# Altium PCB TLC5510.PcbDoc
Units mil, origin at the board's own origin, x right, y up, seen from the top; angles counter-clockwise.
Board outline 6000 x 4000 mil, 2 copper layers (Top Layer, Bottom Layer); 58 components, 38 nets, 167 pads, 0 vias.
Unrouted connection lines stored in the file: 8.
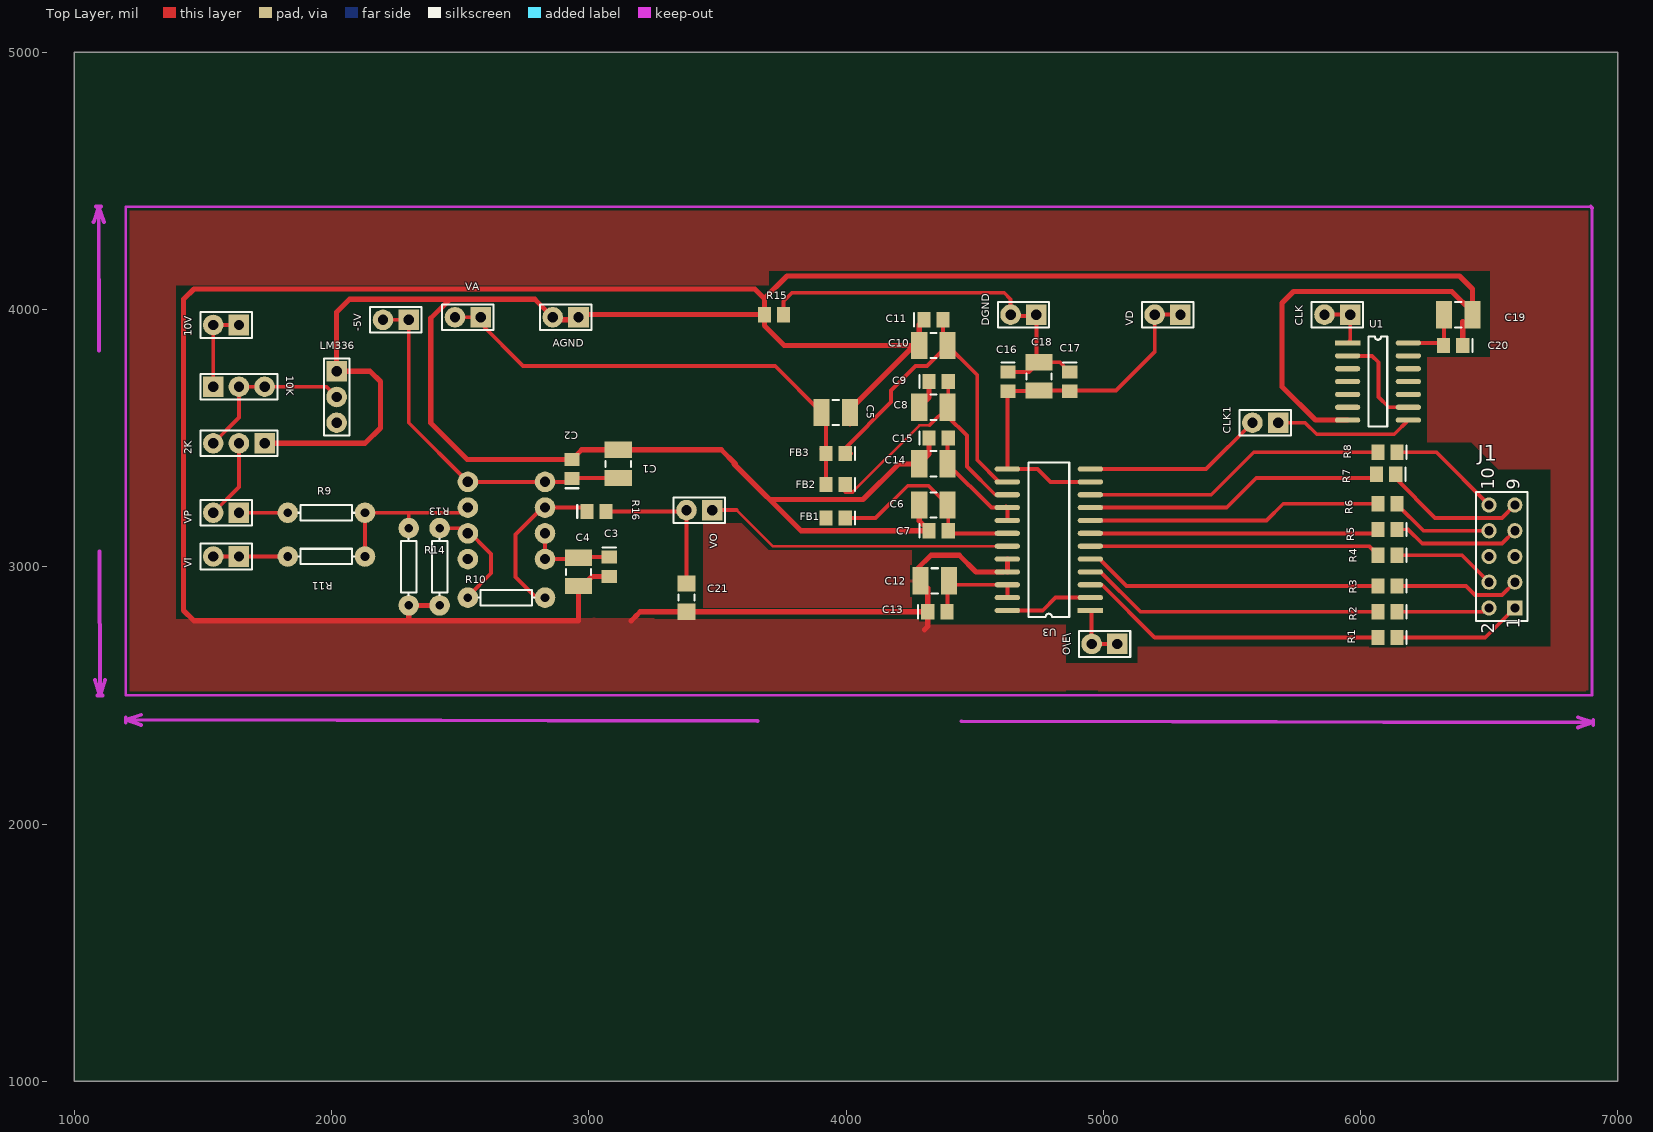
[diagram p0: Top Layer view]
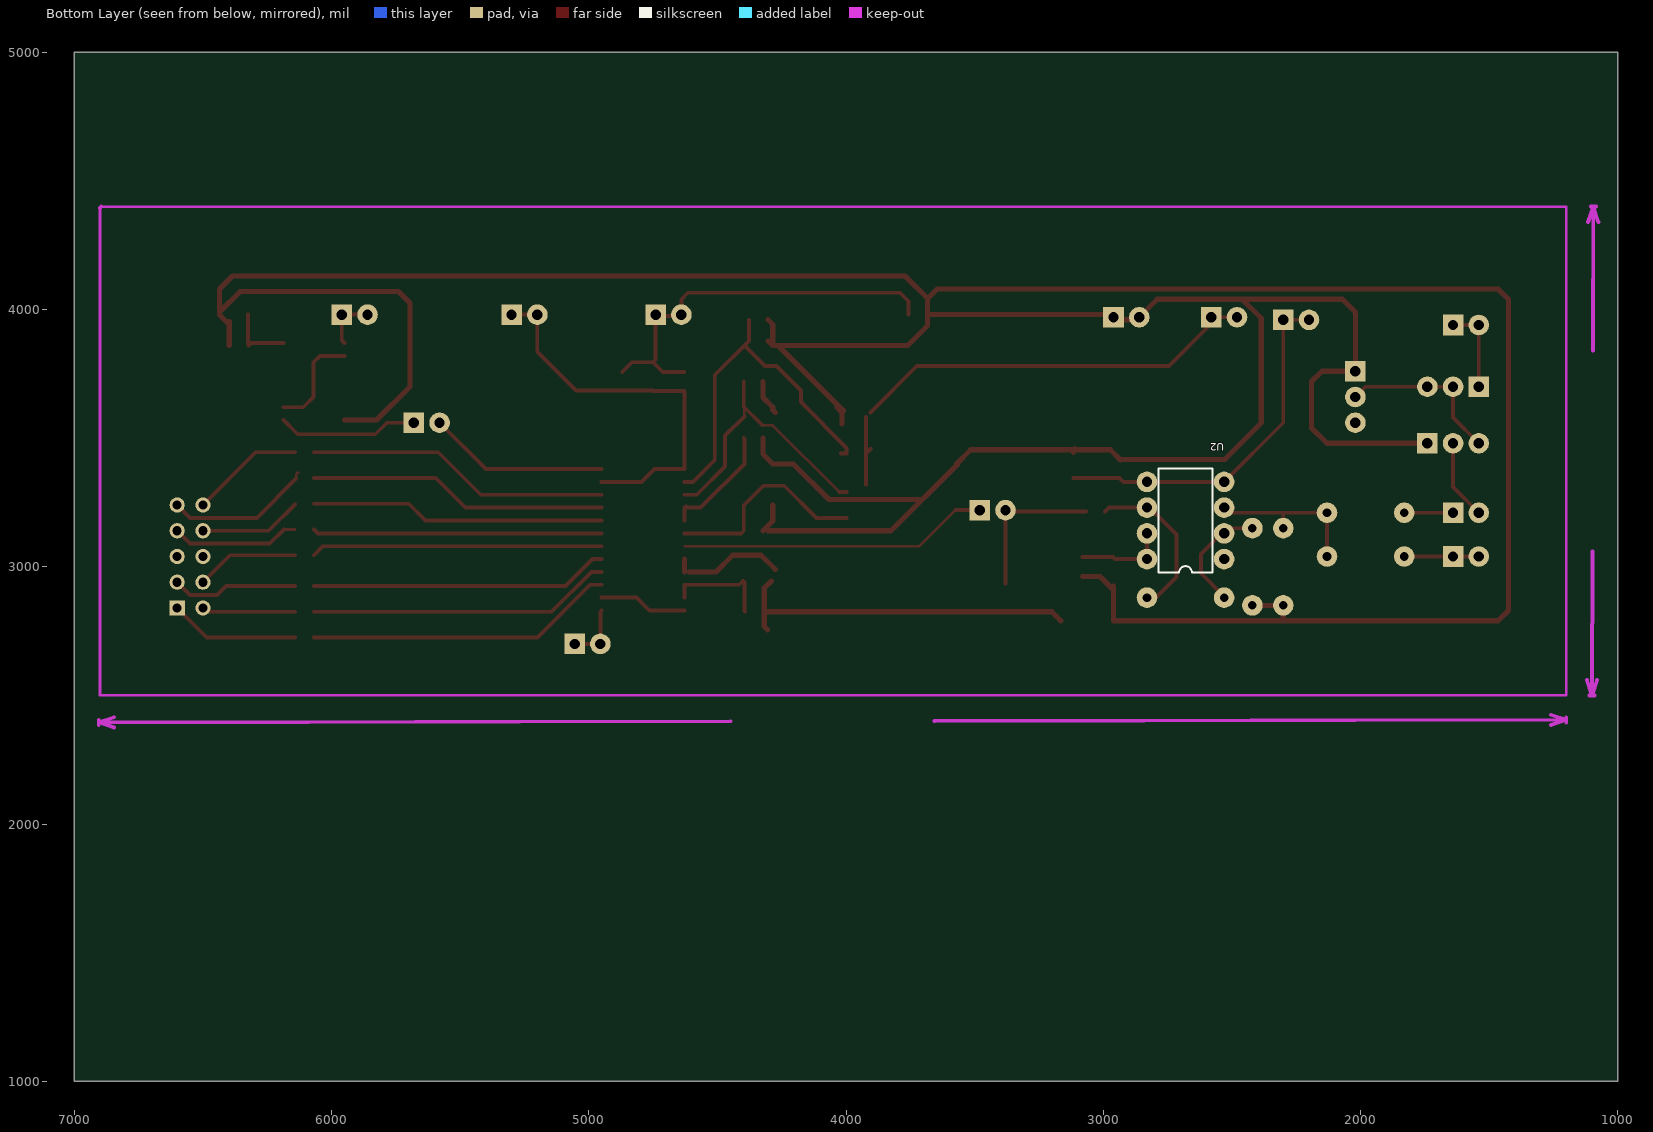
[diagram p1: Bottom Layer view, seen from below]

## Layer stack, top to bottom
Top Layer: signal copper 1.4
Dielectric: dielectric 12.6, FR-4, Dk 4.8
Bottom Layer: signal copper 1.4

## Board outline
1000,1000 7000,1000 7000,5000 1000,5000

## Design rules (kind name [scope] priority, off if disabled: settings)
Clearance [All] p1: gap=10
ComponentClearance [All] p1: gap=10 collisioncheckmode=0
PolygonConnect [All] p1: connectstyle=Relief reliefconductorwidth=10 reliefentries=4 polygonreliefangle="90 Angle"
RoutingVias [All] p1: holewidth=28 width=50 viastyle="Through Hole" minholewidth=28 minwidth=50 maxholewidth=28 maxwidth=50
SolderMaskExpansion [All] p1: expansion=4
TestPointUsage [All] p1: valid=0 allowmultiple=FALSE
Testpoint [All] p1: side=15 testpointundercomponent=TRUE minsize=40 maxsize=100 preferedsize=60 minholesize=0 maxholesize=40 preferedholesize=32 testpointgrid=1 style=1023 order=-539222988
Width [InNet('GND')] p1: maxlimit=20 minlimit=10 preferedwidth=10 toplayer_prefwidth=20 minimp=50.000000 maximp=50.000000 favimp=50.000000
17 further rules are at their usual default settings.

## Components (designator, comment, footprint, x,y, rotation, side; value= is the part's Value field where it differs from the comment)
2K "" HDR1X3 1740,3480 r180 top
10K "" HDR1X3 1540,3700 r0 top
10V "" HDR1X2 1640,3940 r180 top
-5V "" HDR1X2 2300,3960 r180 top
AGND "" HDR1X2 2960,3970 r180 top
C1 "" CR3225-1210 3115,3400 r270 top
C2 "" CC2012-0805 2935,3380 r90 top
C3 "" CC2012-0805 3080,3000 r270 top
C4 "" CR3225-1210 2960,2980 r270 top
C5 "" CR3225-1210 3960,3600 r0 top
C6 "" CR3225-1210 4340,3240 r180 top
C7 "" CC2012-0805 4360,3140 r0 top
C8 "" CR3225-1210 4340,3620 r180 top
C9 "" CC2012-0805 4360,3720 r0 top
C10 "" CR3225-1210 4340,3860 r180 top
C11 "" CC2012-0805 4340,3960 r0 top
C12 "" CR3225-1210 4345,2945 r180 top
C13 "" CC2012-0805 4355,2825 r0 top
C14 "" CR3225-1210 4340,3400 r180 top
C15 "" CC2012-0805 4360,3500 r0 top
C16 "" CC2012-0805 4630,3720 r270 top
C17 "" CC2012-0805 4870,3720 r270 top
C18 "" CR3225-1210 4750,3740 r90 top
C19 "" CR3225-1210 6380,3980 r0 top
C20 "" CC2012-0805 6360,3860 r180 top
C21 "" CR3216-1206 3380,2880 r270 top
CLK "" HDR1X2 5960,3980 r180 top
CLK1 "" HDR1X2 5680,3560 r180 top
DGND "" HDR1X2 4740,3980 r180 top
FB1 "" CC2012-0805 3960,3190 r180 top
FB2 "" CC2012-0805 3960,3320 r180 top
FB3 "" CC2012-0805 3960,3440 r180 top
J1 "" HDR2X5 6600,2840 r90 top
LM336 "" HDR1X3 2020,3760 r270 top
O\E\ "" HDR1X2 5055,2700 r180 top
R1 "" CC2012-0805 6105,2725 r180 top
R2 "" CC2012-0805 6105,2825 r180 top
R3 "" CC2012-0805 6105,2925 r180 top
R4 "" CC2012-0805 6105,3045 r180 top
R5 "" CC2012-0805 6105,3145 r180 top
R6 "" CR2012-0805 6105,3245 r180 top
R7 "" CC2012-0805 6100,3360 r180 top
R8 "" CC2012-0805 6105,3445 r180 top
R9 "Res1" AXIAL-0.3#1 1980,3210 r0 top
R10 "Res1" AXIAL-0.3#1 2300,3000 r90 top
R11 "Res1" AXIAL-0.3#1 1980,3040 r0 top locked
R13 "Res1" AXIAL-0.3#2 2420,3000 r90 top
R14 "Res1" AXIAL-0.3#1 2680,2880 r180 top
R15 "Res1" CR2012-0805 3720,3980 r0 top
R16 "" CC2012-0805 3030,3215 r0 top
U1 "OPA642" SOP-14 5950,3870 r0 top
U2 "OPA642" DIP-8 2680,3180 r90 bottom
U3 "OPA642" "SOP-24 - duplicate3" 4950,2830 r180 top
VA "" HDR1X2 2580,3970 r180 top
VD "" HDR1X2 5300,3980 r180 top
VI "" HDR1X2 1640,3040 r180 top
VO "" HDR1X2 3480,3220 r180 top
VP "" HDR1X2 1640,3210 r180 top

## Footprints (in the part's own frame and the unit in brackets; to place one, negate y for a bottom-side part, rotate by r counter-clockwise, add the part's x,y. Pads: shape width x height; smd on the part's side, far side on the other; paste and mask are expansions set on the pad)
AXIAL-0.3#1 [mil] "Resistor; 2 Leads"
  round 80 hole 33.47: 1(-150,0) 2(150,0)
  silkscreen extent -109,-30 109,30
AXIAL-0.3#2 [mil] "Resistor; 2 Leads"
  round 80 hole 33.47: 1(-150,0)
  round 80 hole 33.47 paste+0: 2(150,0)
  silkscreen extent -109,-30 109,30
CC2012-0805 [mm] "Chip Capacitor; Body 2.0 x 1.2 mm (LxW typ)"
  rect 1.3x1.5 smd: 1(-0.95,0) 2(0.95,0)
  silkscreen extent -1.9,-0.65 -1.9,0.65
CR2012-0805 [mm] "Chip Resistor; Body 2.0 x 1.3 mm (LxW typ)"
  rect 1.3x1.5 smd: 1(-0.95,0) 2(0.95,0)
CR3216-1206 [mm] "Chip Resistor; Body 3.2 x 1.6 mm (LxW typ)"
  rect 1.6x1.8 smd: 1(-1.4,0) 2(1.4,0)
  silkscreen extent -0.3,-0.8 0.3,0.8
CR3225-1210 [mm] "Chip Resistor; Body 3.2 x 2.5 mm (LxW typ)"
  rect 1.6x2.7 smd: 1(-1.4,0) 2(1.4,0)
  silkscreen extent -0.3,-1.25 0.3,1.25
DIP-8 [mil] "DIP; 8 Leads; Row Spacing 7.62 mm; Pitch 2.54 mm"
  round 80 hole 40 unplated: 1(-150,-150) 2(-50,-150) 3(50,-150) 4(150,-150) 5(150,150) 6(50,150) 7(-50,150) 8(-150,150)
  silkscreen extent -203,-104 203,104
HDR1X2 [mil] "Connector; Header; 2 Position"
  rect 80x80 hole 40 unplated: 1(0,0)
  round 80 hole 40 unplated: 2(100,0)
  silkscreen extent -50,-50 150,50
HDR1X3 [mil] "Connector; Header; 3 Position"
  rect 80x80 hole 40 unplated: 1(0,0)
  round 80 hole 40 unplated: 2(100,0) 3(200,0)
  silkscreen extent -50,-50 250,50
HDR2X5 [mm] "Connector; Header; 5x2 Position"
  rect 1.5x1.5 hole 0.9: 1(0,0)
  round 1.5 hole 0.9: 2(0,2.54) 3(2.54,0) 4(2.54,2.54) 5(5.08,0) 6(5.08,2.54) 7(7.62,0) 8(7.62,2.54) 9(10.16,0) 10(10.16,2.54)
  silkscreen extent -1.27,-1.27 11.43,3.81
SOP-14 [mm]
  rect 2.5x0.51 smd: 1(0,0)
  oval 2.5x0.51 smd: 2(0,-1.27) 3(0,-2.54) 4(0,-3.81) 5(0,-5.08) 6(0,-6.35) 7(0,-7.62) 8(6,-7.62) 9(6,-6.35) 10(6,-5.08) 11(6,-3.81) 12(6,-2.54) 13(6,-1.27) 14(6,0)
  silkscreen extent 2.08,-8.25 3.92,0.64
"SOP-24 - duplicate3" [mm]
  rect 2.5x0.51 smd: 1(0,0)
  oval 2.5x0.51 smd: 2(0,-1.27) 3(0,-2.54) 4(0,-3.81) 5(0,-5.08) 6(0,-6.35) 7(0,-7.62) 8(0,-8.89) 9(0,-10.16) 10(0,-11.43) 11(0,-12.7) 12(0,-13.97) 13(8.2,-13.97) 14(8.2,-12.7) 15(8.2,-11.43) 16(8.2,-10.16) 17(8.2,-8.89) 18(8.2,-7.62) 19(8.2,-6.35) 20(8.2,-5.08) 21(8.2,-3.81) 22(8.2,-2.54) 23(8.2,-1.27) 24(8.2,0)
  silkscreen extent 2.08,-14.6 6.11,0.64

## Part data
2K 10K LM336: library part "Header 3", "Header, 3-Pin"
10V -5V AGND CLK CLK1 DGND O\E\ VA VD VI VO VP: library part "Header 2", "Header, 2-Pin"
C1 C4 C5 C6 C8 C10 C12 C14 C18 C19 C21: library part Cap2, "Capacitor"
C2 C3 C7 C9 C11 C13 C15 C16 C17 C20: library part Cap, "Capacitor"
FB1 FB2 FB3 R16: library part Res1, "Resistor"
J1: library part "Header 5X2", "Header, 5-Pin, Dual row"
R1 R2 R3 R4 R5 R6 R7 R8: library part Res2, "Resistor"
R9 R10 R11 R13 R14 R15: "Resistor"
U1: library part 74ACT04
U3: library part TLC5510

## Nets (pads, with @x,y where several pads share a name; then routed paths per layer and width w, separated by ;. In a path a pad name is that pad's centre, name@x,y a point inside that pad or via, vN(x,y) a via of type N, cw(c..) or ccw(c..) an arc to the next point about the centre after c; other vN are vias at no path point)
10V: 10K.1 10V.1 10V.2 | length 340
  Top Layer w15: 10K.1 10V.2 10V.1
CLK: CLK.1 CLK.2 U1.1 | length 228.3
  Top Layer w15: CLK.2 CLK.1 ; U1.1 5960,3880 CLK.1 ; CLK.1@5950,3970 CLK.1
CLK1: CLK1.1 CLK1.2 U1.8 U3.12 | length 1252.2
  Top Layer w15: U3.12 5400,3380 CLK1.2 ; CLK1.1 5785,3560 5830,3515 6131.22,3515 U1.8
D1: R1.2 U3.3 | length 1202.5
  Top Layer w15: U3.3 4995,2930 5200,2725 R1.2
D2: R2.2 U3.4 | length 1181.8
  Top Layer w15: U3.4 4990,2980 5145,2825 R2.2
D3: R3.2 U3.5 | length 1161.1
  Top Layer w15: U3.5 4985,3030 5090,2925 R3.2
D4: R4.2 U3.6 | length 1132.1
  Top Layer w15: U3.6 6032.6,3080 R4.2
D5: R5.2 U3.7 | length 1123.8
  Top Layer w15: U3.7 6052.6,3130 R5.2
D6: R6.2 U3.8 | length 1144.5
  Top Layer w15: U3.8 5635,3180 5700,3245 R6.2
D7: R7.2 U3.9 | length 1165.2
  Top Layer w15: U3.9 5480,3230 5595,3345 R7.2@6067.6,3345
D8: R8.2 U3.10 | length 1185.9
  Top Layer w15: U3.10 5420,3280 5585,3445 R8.2
DGND: C16.1 C17.1 C18.2 DGND.1 DGND.2 R15.2 U3.2 U3.24 | length 1951
  Top Layer w15: R15.2 3757.4,4032.4 3790,4065 4615,4065 4640,4040 DGND.2 ; DGND.2@4620,3995 4640,3975 DGND.1@4740,3975 ; U3.24 4765,2830 4815,2880 U3.2 ; C16.1 4712.28,3757.4 C18.2 ; DGND.1 4740,3805.12 C18.2 ; C17.1 4832.28,3795.12 C18.2
GND: 2K.1 AGND.1 AGND.2 C1.1 C2.2 C3.2 C4.2 C5.2 C6.2 C7.1 C8.2 C9.1 C10.2 C11.1 C12.2 C13.1 C14.2 C15.1 C19.2 C20.1 C21.2 LM336.1 R10.1 R13.1 R15.1 U1.7 U3.20 U3.21 | length 19679.7
  Top Layer w20: 2K.1 2130,3480 2190,3540 2190,3720 2150,3760 LM336.1 2020,3990 2070,4040 2790,4040 2870,3960 AGND.1@2965,3960 ; LM336.1@2005,3785 LM336.1@2030,3760 ; 2300,2790 R10.1 R13.1 ; 2460,4040 2385.89,3965.89 2385.89,3559.11 2527.6,3417.4 C2.2 ; AGND.2 AGND.2@2860,4000 ; C2.2@2932.72,3415.12 2972.72,3455.12 3514.88,3455.12 3570,3400 3565,3400 3825,3140 C7.1@4302.6,3140 ; C4.2@2960,2910 3012.6,2962.6 C3.2 ; C4.2 2960,2790 1465,2790 1425,2830 1425,4040 1465,4080 3645,4080 3682.6,4042.4 ; AGND.1@2975,3970 AGND.1 2970,3980 R15.1 ; C1.1@3110,3460 C1.1@3110.12,3460 ; C1.1@3115,3445 C1.1 ; 3165,2790 3200,2825 C13.1 ; 3180,2804.88 3200.12,2825 ; 3703.9,3261.1 4066.1,3261.1 4205,3400 C14.2 4322.6,3437.72 C15.1 ; C5.2@4010,3610 4010,3605.12 C10.2@4264.88,3860 ; C5.2@4015.12,3554.88 C5.2 C5.2@4035.12,3620 ; C12.2@4275,2990 4330,3045 4440,3045 4505,2980 U3.21@4610,2980 ; C8.2@4275,3600 4284.88,3609.88 C8.2 4322.6,3657.72 C9.1 ; C6.2 4284.88,3177.72 C7.1 ; C12.2 4317.6,2917.28 4317.6,2767.6 4305,2755 ; C10.2@4302.6,3877.72 C10.2 ; C11.1 4284.88,3942.28 C10.2 ; U3.21 U3.20 ; U1.7 5825,3570 5695,3700 5695,4025 5740,4070 6355.12,4070 C19.2@6435.12,3990 ; C20.1 6397.4,3952.28 ; 6397.4,3942.28 C19.2 6435.12,4029.88 6435.12,4079.88 6385,4130 3770.2,4130 3682.6,4042.4 ; R15.1 3682.6,4042.4 ; R15.1 3682.6,3937.4 3760,3860 C10.2
Net2K_3: 2K.3 10K.2 10K.3 LM336.2 | length 658
  Top Layer w15: 2K.3 1640,3580 10K.2 1980,3700 LM336.2
NetJ1_1: J1.1 R1.1 | length 505.2
  Top Layer w15: R1.1 6485,2725 J1.1
NetJ1_2: J1.2 R2.1 | length 342.6
  Top Layer w15: R2.1 J1.2@6485,2825
NetJ1_3: J1.3 R3.1 | length 492.8
  Top Layer w15: R3.1 6410,2925 6445,2890 6550,2890 J1.3
NetJ1_4: J1.4 R4.1 | length 401.1
  Top Layer w15: R4.1 6395,3045 J1.4
NetJ1_7: J1.7 R5.1 | length 501.1
  Top Layer w10: R5.1 6185,3145
  Top Layer w15: 6185,3145 6240,3090 6550,3090 J1.7
NetJ1_8: J1.8 R6.1 | length 402.5
  Top Layer w10: R6.1@6142.4,3242.6 R6.1
  Top Layer w15: R6.1@6142.4,3242.6 6245,3140 J1.8
NetJ1_9: J1.9 R7.1 | length 566.3
  Top Layer w10: R7.1@6130,3365 R7.1@6132.4,3365 ; R7.1@6137.4,3342.6 R7.1
  Top Layer w15: R7.1@6137.4,3342.6 6290,3190 6550,3190 J1.9
NetJ1_10: J1.10 R8.1 | length 442.5
  Top Layer w15: R8.1 6295,3445 J1.10
NetR9_2: R9.2 R10.2 R11.2 U2.3 | length 648.3
  Top Layer w15: R11.2 R9.2@2130,3220 ; R9.2 2510,3210 U2.3 ; R10.2 2300,3210
NetR13_2: R13.2 R14.2 U2.2 | length 448.7
  Top Layer w15: R13.2 2520,3150 2620,3050 2620,2975 2530,2885 R14.2
NetR14_1: R14.1 R16.1 U2.6 | length 633.4
  Top Layer w15: R14.1 2795,2880 2715,2960 2715,3125 2820,3230 R16.1@2977.6,3230 ; R16.1@2982.6,3225 R16.1
NetU1_2: U1.2 U1.9 | length 398.1
  Top Layer w15: U1.2 6045,3820 6070,3795 6070,3660 6110,3620 U1.9
O\E\: O\E\.1 O\E\.2 U3.1 | length 232.1
  Top Layer w15: U3.1 4955,2825 O\E\.2 O\E\.1
RB: C12.1 C13.2 U3.22 U3.23 | length 399.2
  Top Layer w15: C13.2 4395,2827.6 C12.1@4395,2939.88 ; C12.1 4415.12,2930 U3.22 U3.23
RT: C14.1 C15.2 U3.16 U3.17 | length 460.5
  Top Layer w15: C15.2 4395.12,3497.72 C14.1 4565.12,3230 U3.16 ; U3.16@4622.17,3235 U3.16 ; U3.17 U3.16
VA1: C6.1 C7.2 FB1.1 U3.18 | length 815.4
  Top Layer w15: FB1.1 4115,3190 4240,3315 4320.12,3315 4397.4,3237.72 C7.2 4407.4,3130 U3.18
VA2: C8.1 C9.2 FB2.1 U3.15 | length 1099.1
  Top Layer w10: 4025,3290 4285,3550 4325.12,3550 ; C8.1@4395.12,3584.88 C8.1 ; U3.15@4580,3280 U3.15@4585,3280
  Top Layer w15: 3997.4,3290 4025,3290 ; 4325.12,3550 4397.4,3622.28 C9.2 ; C8.1@4395.12,3584.88 4470,3510 4470,3390 U3.15@4580,3280 ; U3.15@4585,3280 U3.15
VA3: C10.1 C11.2 FB3.1 U3.14 | length 1386.1
  Top Layer w15: FB3.1@4020,3440 FB3.1 3997.4,3462.4 4175,3640 4175,3685 4270,3780 4315,3780 4395,3860 C10.1 ; C11.2 4377.4,3877.72 4510,3745.12 4510,3415 4595,3330 U3.14
VCC: C3.1 C4.1 C5.1 C19.1 C20.2 FB1.2 FB2.2 FB3.2 U1.14 U2.7 U2.8 VA.1 VA.2 | length 2487.4
  Top Layer w15: VA.2 VA.1 2580,3945 2745,3780 3724.88,3780 C5.1 ; U2.7 U2.8 C4.1@2954.88,3030 ; C4.1 2962.28,3037.4 C3.1 ; FB3.2@3904.88,3457.72 FB3.2 ; FB2.2 C5.1@3922.6,3582.28 ; U1.14 6312.6,3870 C20.2 6322.6,3872.83 6324.88,3875.12 C19.1
VD: C16.2 C17.2 C18.1 U3.11 U3.13 VD.1 VD.2 | length 1538.2
  Top Layer w15: C16.2@4627.17,3679.76 U3.13 4745,3380 4795,3330 U3.11 ; C16.2 C18.1@4747.72,3682.6 ; C18.1 5049.88,3684.88 5200,3835 VD.2 VD.1@5320,3980
VEE: -5V.1 -5V.2 C1.2 C2.1 U2.4 U2.5 | length 1416.4
  Top Layer w15: -5V.2 -5V.1 2300,3560 U2.4 2922.4,3330 2937.28,3344.88 C1.2
VI: R11.1 VI.1 VI.2 | length 309.1
  Top Layer w15: VI.2@1525,3050 1530,3050 VI.2 R11.1
VO: C21.1 R16.2 U3.19 VO.1 VO.2 | length 1809.7
  Top Layer w10: 3575,3220 3715,3080 U3.19
  Top Layer w15: R16.2 VO.2@3375,3215 ; C21.1 3380,3225 VO.2@3385,3230 ; VO.1 3575,3220
VP: 2K.2 R9.1 VP.1 VP.2 | length 501.4
  Top Layer w15: VP.2 1640,3310 2K.2 ; VP.1 R9.1
pads on no net: J1.5 J1.6 LM336.3 U1.3 U1.4 U1.5 U1.6 U1.10 U1.11 U1.12 U1.13 U2.1

## Polygon pours and split planes (outlines as drawn)
GND on Top Layer (solid): 1205,2795 4320,2795 4320,2510 1210,2510 1210,2795
GND on Top Layer (solid): 1210,4190 1395,4190 1395,2785 1215.29,2785 1215.29,4175
GND on Top Layer (solid): 1210,4390 1210,4095 3700,4095 3700,4395 1215,4395
GND on Top Layer (solid): 2695,2800 3255,2800 3255,2655 2735,2655 2735,2800
GND on Top Layer (solid): 3700,4384.71 6890,4384.71 6890,4150 3700,4150
GND on Top Layer (solid): 4315,2525 6875,2525 6875,2690 5135,2690 5135,2525
GND on Top Layer (solid): 4320,2775 4855,2775 4855,2510 4370,2510 4370,2515 4320,2515
GND on Top Layer (solid): 4845,2625 5155,2625 5155,2520 4840,2520
GND on Top Layer (solid): 4855,2515.29 6875,2515.29 6875,2535
GND on Top Layer (solid): 4870,2515 5395,2515 5395,2540
GND on Top Layer (solid): 4843.62,2520 5710,2520 5710,2565 4955,2565 4955,2535
GND on Top Layer (solid): 6884.71,4150 6884.71,2520 6740,2520 6740,4195
GND on Top Layer (solid): 6260,3805 6260,3485 6430,3485 6535,3380 6755,3380 6755,3815 6260,3815
GND on Top Layer (solid): 6505,4155 6505,3805 6780,3805 6780,4165 6510,4165
GND on Top Layer (solid): 5695,2585 5695,2520 5835,2520 5835,2560 5735,2560
GND on Top Layer (solid): 3445,3160 3445,2840 4255,2840 4255,3065 3700,3065 3595,3170 3445,3170

## Keep-outs
Keep-Out Layer:
  lines w10: 6400,2500 6900,2500 6900,3840 6900,4200 6900,4395 ; 6420,2500 2910,2500 1200,2500 1200,3055 1200,4200 1200,4400 6895,4400
  lines w15: 1075.16,4339.95 1095,4400 ; 1079.84,2559.95 1100,2500 ; 1085,4399.97 1105,4400.03 ; 1090,2499.97 1110,2500.03 ; 1096.47,3840.88 1095,4400 ; 1098.53,3059.12 1100,2500 ; 1115.16,4340.05 1095,4400 ; 1119.84,2560.05 1100,2500 ; 1199.98,2395 1200.02,2415 ; 1259.96,2384.89 1200,2405 ; 1260.04,2424.89 1200,2405 ; 3656.62,2400.69 1200,2405 ; 4448.38,2399.31 6905,2395 ; 6844.97,2375.11 6905,2395 ; 6845.04,2415.11 6905,2395 ; 6895,4400 6900,4395 ; 6904.98,2385 6905.02,2405
  text "1900.007 (mil)" at 1060.51,3830.78 h60 r270.15
  text "5705.009 (mil)" at 3666.56,2364.69 h60 r359.9

## Text inside footprints (layer, text, board x,y; h text height)
J1: Top Overlay "2" at 6520,2740 h50 r90; Top Overlay "1" at 6620,2760 h50 r90; Top Overlay "9" at 6620,3300 h50 r90; Top Overlay "10" at 6520,3300 h50 r90